# Altium PCB PCB - 100x100 - 85x85.PcbDoc
Units mil, origin at the board's own origin, x right, y up, seen from the top; angles counter-clockwise.
Board outline 1900 x 2400 mil, 2 copper layers (Top Layer, Bottom Layer); 21 components, 34 nets, 92 pads, 0 vias.
Unrouted connection lines stored in the file: 4.
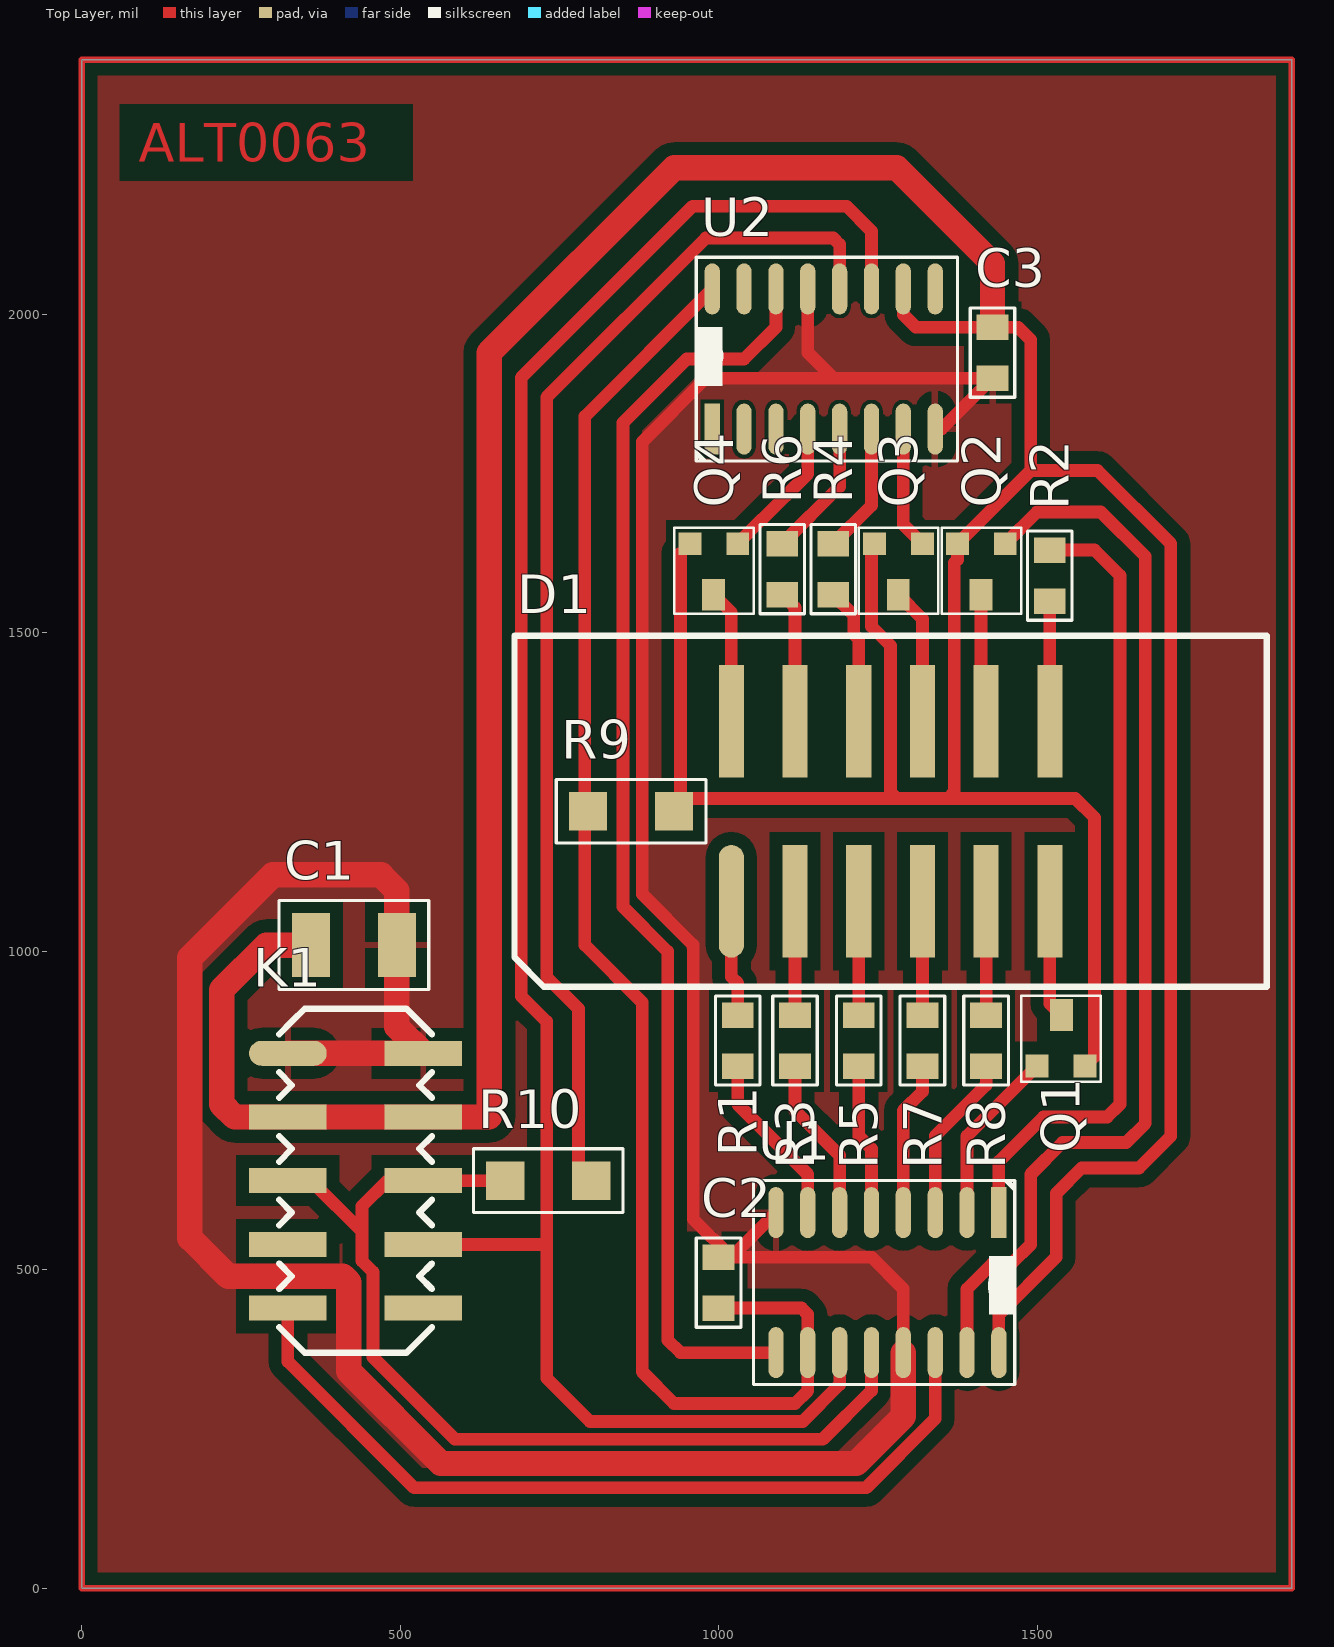
[diagram p0: Top Layer view]
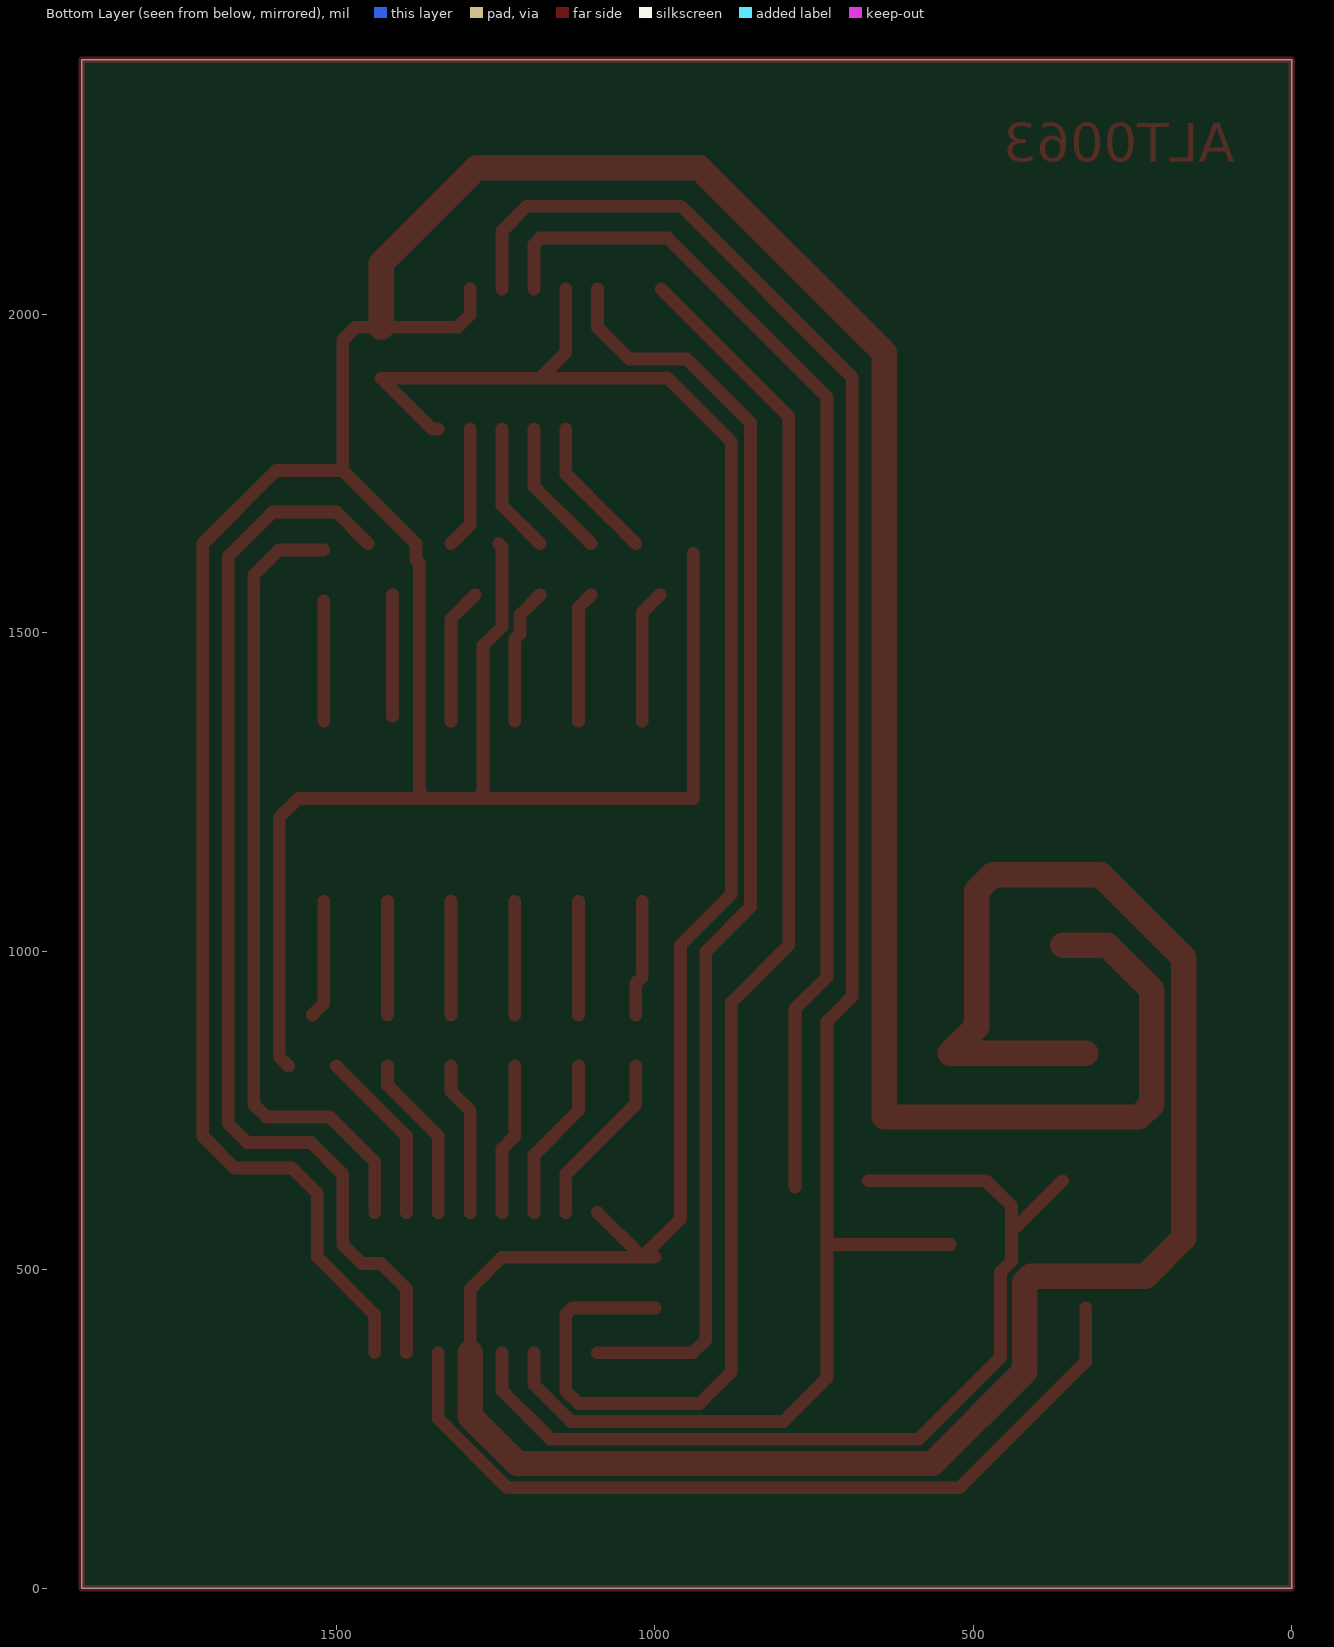
[diagram p1: Bottom Layer view, seen from below]

## Layer stack, top to bottom
Top Solder: solder mask 0.4, Solder Resist, Dk 3.5
Top Layer: signal copper 1.4
Dielectric1: dielectric 12.6, FR-4, Dk 4.8
Bottom Layer: signal copper 1.4
Bottom Solder: solder mask 0.4, Solder Resist, Dk 3.5

## Board outline
0,0 0,2400 1900,2400 1900,0

## Design rules (kind name [scope] priority, off if disabled: settings)
Clearance Clearance_2 [(InComponent('U2') OR InComponent('C8'))] p1: gap=6
Clearance Clearance_1 [InPolygon] p2: gap=20
Clearance [All] p3: gap=8
MinimumSolderMaskSliver [All] p1: minsoldermaskwidth=1
PlaneConnect [All] p1: planeconnectstyle=Relief reliefexpansion=20 reliefentries=4 reliefconductorwidth=10 reliefairgap=20
PolygonConnect [All] p1: connectstyle=Relief reliefconductorwidth=10 reliefentries=4 polygonreliefangle="90 Angle" airgapwidth=20
RoutingVias [All] p1: holewidth=28 width=50 viastyle="Through Hole" minholewidth=28 minwidth=50 maxholewidth=28 maxwidth=50
SilkToSilkClearance [All] p1: silktosilkclearance=0
SilkToSolderMaskClearance [IsPad] p1: minsilkscreentomaskgap=0 clearancetoexposedcopper=TRUE
SolderMaskExpansion [All] p1: expansion=4
Width [All] p1: maxlimit=100 minlimit=10 preferedwidth=20
26 further rules are at their usual default settings.

## Components (designator, comment, footprint, x,y, rotation, side; value= is the part's Value field where it differs from the comment)
C1 "1210" 1210C-GENERIC 360,1010 r0 top
C2 "100nF" 0805C-TBD 1000,450 r90 top
C3 "100nF" 0805C-TBD 1430,1970 r270 top
D1 "LED_7Segment_HS-3461B" HS3461 1270,1220 r90 top
K1 "Connector_Headers_SMD_M_5x2" "Header_Male_2.54 5x2" 430,840 r0 top
Q1 "2N7002" SOT23-GDS 1500,820 r90 top
Q2 "2N7002" SOT23-GDS 1450,1640 r270 top
Q3 "2N7002" SOT23-GDS 1320,1640 r270 top
Q4 "2N7002" SOT23-GDS 1030,1640 r270 top
R1 "180R" 0805R-180 1030,830 r90 top
R2 "180R" 0805R-180 1520,1560 r90 top
R3 "180R" 0805R-180 1120,830 r90 top
R4 "180R" 0805R-180 1180,1570 r90 top
R5 "180R" 0805R-180 1220,830 r90 top
R6 "180R" 0805R-180 1100,1570 r90 top
R7 "180R" 0805R-180 1320,830 r90 top
R8 "180R" 0805R-180 1420,830 r90 top
R9 "1206R-0R" 1206R-GENERIC 930,1220 r180 top
R10 "1206R-0R" 1206R-GENERIC 800,640 r180 top
U1 "74HC_SIPO_SMD_74595" SO16 1440,590 r270 top
U2 "74HC_SIPO_SMD_74595" SO16 990,1820 r90 top

## Footprints (in the part's own frame and the unit in brackets; to place one, negate y for a bottom-side part, rotate by r counter-clockwise, add the part's x,y. Pads: shape width x height; smd on the part's side, far side on the other; paste and mask are expansions set on the pad)
0805C-TBD [mil] "CAPACITOR 0805"
  rect 40x50 smd: 1(-10,0) 2(70,0)
  silkscreen extent -40,-35 100,35, body extent -11,-25 70,25, height 26
0805R-180 [mil] "RESISTOR 0805"
  rect 40x50 smd: 1(-10,0) 2(70,0)
  silkscreen extent -40,-35 100,35, body extent -11,-25 70,25, height 27
1206R-GENERIC [mil]
  rect 60x60 smd: 1(0,0) 2(135,0)
  silkscreen extent -50,-50 185,50
1210C-GENERIC [mil]
  rect 60x100 smd: 1(0,0) 2(135,0)
  silkscreen extent -50,-70 185,70, body extent -10,-50 145,50, height 46
"Header_Male_2.54 5x2" [mm]
  oval 3.1x1 smd: 1(-2.7,0)
  rect 3.1x1 smd: 2(2.7,0) 3(-2.7,-2.54) 4(2.7,-2.54) 5(-2.7,-5.08) 6(2.7,-5.08) 7(-2.7,-7.62) 8(2.7,-7.62) 9(-2.7,-10.16) 10(2.7,-10.16)
  silkscreen extent -3.05,-11.94 3.05,1.78
HS3461 [mm]
  oval 4.5x1 smd: 1(-3.589,6.35)
  rect 4.5x1 smd: 2(-3.589,3.81) 3(-3.589,1.27) 4(-3.589,-1.27) 5(-3.589,-3.81) 6(-3.589,-6.35) 7(3.589,-6.35) 8(3.589,-3.81) 9(3.589,-1.27) 10(3.589,1.27) 11(3.589,3.81) 12(3.589,6.35)
  silkscreen extent -7,-15 7,15
SO16 [mil]
  rect 80x24 smd: 1(0,0)
  oval 80x24 smd: 2(0,-50) 3(0,-100) 4(0,-150) 5(0,-200) 6(0,-250) 7(0,-300) 8(0,-350) 9(220,-350) 10(220,-300) 11(220,-250) 12(220,-200) 13(220,-150) 14(220,-100) 15(220,-50) 16(220,0)
  silkscreen extent -50,-385 270,25, body extent -20,-385 240,25, height 61
SOT23-GDS [mil]
  rect 50x36 smd: D(80,-38)
  rect 36x36 smd: G(0,0) S(0,-75)
  silkscreen extent -25,-100 110,25, body extent -3,-95 94,20, height 41

## Part data
C1: library part Passives_Capacitors_1210_1210C-TBD, "CAPACITOR 1210 CERAMIC VALUE TO BE DETERMINED"
C2 C3: library part Passives_Capacitors_0805_100nF-25V-X7R-MUR, "CAPACITOR 0805 CERAMIC"
K1: "SMD Header 5x2"
Q1 Q2 Q3 Q4: library part 2N7002-SOT23, "N CHANNEL MOSFET 2N7002 SOT23"
R1 R2 R3 R4 R5 R6 R7 R8: library part 0805R-180, "RESISTOR 0805 1/4 WATT THIN FILM"
U1 U2: "8-BIT SFT REG WIRTH OUTPUT LCH"

## Nets (pads, with @x,y where several pads share a name; then routed paths per layer and width w, separated by ;. In a path a pad name is that pad's centre, name@x,y a point inside that pad or via, vN(x,y) a via of type N, cw(c..) or ccw(c..) an arc to the next point about the centre after c; other vN are vias at no path point)
3V3: C1.1 C2.1 C3.1 K1.3 K1.4 Q1.S Q2.S Q3.S Q4.S R9.1 R9.2 U1.10 U1.16 U2.10 U2.16 | length 10017.7
  Top Layer w20: Q4.S@940,1625 940,1240 1280,1240 ; U2.16 790,1840 790,1010 880,920 880,340 930,290 1120,290 1140,310 U1.10 1140,430 1130,440 C2.1 ; Q3.S 1240,1635 1240,1510 1270,1480 1270,1250 1280,1240 ; U2.10 1290,2000 1310,1980 C3.1 1470,1980 1490,1960 1490,1755 ; U1.16 1440,430 1530,520 1530,620 1570,660 1660,660 1710,710 1710,1640 1595,1755 1490,1755 ; Q1.S 1590,835 1590,1210 1560,1240 1360,1240 ; 1280,1240 1360,1240 ; 1360,1240 1370,1250 1370,1610 1375,1615 Q2.S 1490,1755
  Top Layer w40: C1.1 290,1010 220,940 220,760 240,740 K1.3 K1.4 640,740 640,1940 930,2230 1280,2230 1430,2080 C3.1
CLKIN: K1.7 K1.8 U1.11 U2.11 | length 3111.7
  Top Layer w20: K1.8 730,540 ; U1.11 1190,320 1132,262 798,262 730,330 730,890 690,930 690,1900.71 959.29,2170 1200.71,2170 1240,2130.71 U2.11
DIG1: D1.12 Q4.D | length 210.3
  Top Layer w20: Q4.D 1020,1532 D1.12
DIG2: D1.9 Q3.D | length 214.4
  Top Layer w20: Q3.D 1320,1522 D1.9
DIG3: D1.8 Q2.D | length 190.7
  Top Layer w20: D1.8@1412,1369.3 Q2.D
DIG4: D1.6 Q1.D | length 186.2
  Top Layer w20: D1.6 1520,918 Q1.D
DIN: K1.9 K1.10 U1.14 | length 1330.7
  Top Layer w20: K1.9 323.7,356.3 522,158 1231.74,158 1340,266.26 U1.14
GND: C1.2 C2.2 C3.2 K1.1 K1.2 U1.8 U1.13 U2.8 U2.13 | length 5512
  Top Layer w20: C2.2 C2.2@1020,520 ; U1.8 C2.2@1020,520 ; U2.13 1140,1940 1180,1900 ; U1.13 1290,470 1240,520 C2.2@1020,520 ; U2.8 1350,1820 C3.2 1180,1900 ; C2.2@1020,520 960,580 960,1010 880,1090 880,1800 980,1900 1180,1900
  Top Layer w40: K1.1 K1.2 495,881.3 C1.2 495,1095 470,1120 300,1120 170,990 170,550 230,490 410,490 419.28,480.72 419.28,340.72 564,196 1216,196 1290,270 U1.13
HC1_O1: Q2.G U1.15 | length 1711.8
  Top Layer w20: U1.15 1390,470 1430,510 1460,510 1490,540 1490,650 1540,700 1640,700 1670,730 1670,1620 1600,1690 1500,1690 Q2.G
HC1_O2: R2.2 U1.1 | length 1263.8
  Top Layer w20: U1.1 1440,670 1510,740 1610,740 1630,760 1630,1590 1590,1630 R2.2
HC1_O3: Q1.G U1.2 | length 275.6
  Top Layer w20: U1.2 1390,710 Q1.G
HC1_O4: R8.1 U1.3 | length 263.1
  Top Layer w20: U1.3 1340,710 1420,790 R8.1
HC1_O5: R7.1 U1.4 | length 242.4
  Top Layer w20: U1.4 1290,750 1320,780 R7.1
HC1_O6: R5.1 U1.5 | length 238.3
  Top Layer w20: R5.1 1220,710 1240,690 U1.5
HC1_O7: R3.1 U1.6 | length 259
  Top Layer w20: R3.1 1120,750 1190,680 U1.6
HC1_O8: R1.1 U1.7 | length 275.6
  Top Layer w20: R1.1 1030,760 1140,650 U1.7
HC2_O1: U2.15
HC2_O2: U2.1
HC2_O3: U2.2
HC2_O4: U2.3
HC2_O5: Q4.G U2.4 | length 225.8
  Top Layer w20: Q4.G 1030,1640.46 1067.54,1678 1068,1678 1140,1750 U2.4
HC2_O6: R6.2 U2.5 | length 217.3
  Top Layer w20: R6.2 1190,1730 U2.5
HC2_O7: R4.2 U2.6 | length 204.9
  Top Layer w20: R4.2 1240,1700 U2.6
HC2_O8: Q3.G U2.7 | length 192.4
  Top Layer w20: U2.7 1290,1670 Q3.G
LATCH: K1.5 K1.6 R10.1 R10.2 U1.12 U2.12 | length 3424.8
  Top Layer w20: K1.5@360,640 440,560 ; R10.2 K1.6 480,640 440,600 440,560 ; R10.1@780,630 780,910 730,960 730,1870 980,2120 1180,2120 1190,2110 U2.12 ; U1.12 1240,310.4 1163.6,234 586,234 457.28,362.72 457.28,496.46 440,513.74 440,560
NetD1_1: D1.1 R1.2 | length 182.8
  Top Layer w20: D1.1 1020,960 1030,950 R1.2
NetD1_2: D1.2 R3.2 | length 178.7
  Top Layer w20: R3.2 D1.2
NetD1_3: D1.3 R5.2 | length 178.7
  Top Layer w20: R5.2 D1.3
NetD1_4: D1.4 R7.2 | length 178.7
  Top Layer w20: R7.2 D1.4
NetD1_5: D1.5 R8.2 | length 178.7
  Top Layer w20: R8.2 D1.5
NetD1_7: D1.7 R2.1 | length 188.7
  Top Layer w20: D1.7 R2.1
NetD1_10: D1.10 R4.1 | length 215.3
  Top Layer w20: R4.1 1212,1528 1212,1498.4 1220,1490.4 D1.10
NetD1_11: D1.11 R6.1 | length 207
  Top Layer w20: R6.1 1120,1540 D1.11
NetU1_9: U1.9 U2.14 | length 2009.4
  Top Layer w20: U1.9 940,370 920,390 920,1000 850,1070 850,1830 950,1930 1040,1930 1090,1980 U2.14
pads on no net: U2.9
copper on no net: | length 8600
  Top Layer w10: 0,0 1900,0 1900,2400 0,2400 0,0

## Polygon pours and split planes (outlines as drawn)
GND on Top Layer "Top Layer-No Net" (solid, remove dead copper, pour order 2): 0,0 1900,0 1900,2400 0,2400

## Other copper
Top Layer:
  text "ALT0063" at 90,2240 h60